# EAGLE board Clippard 8-MC_v01 (EAGLE 9.7.0)
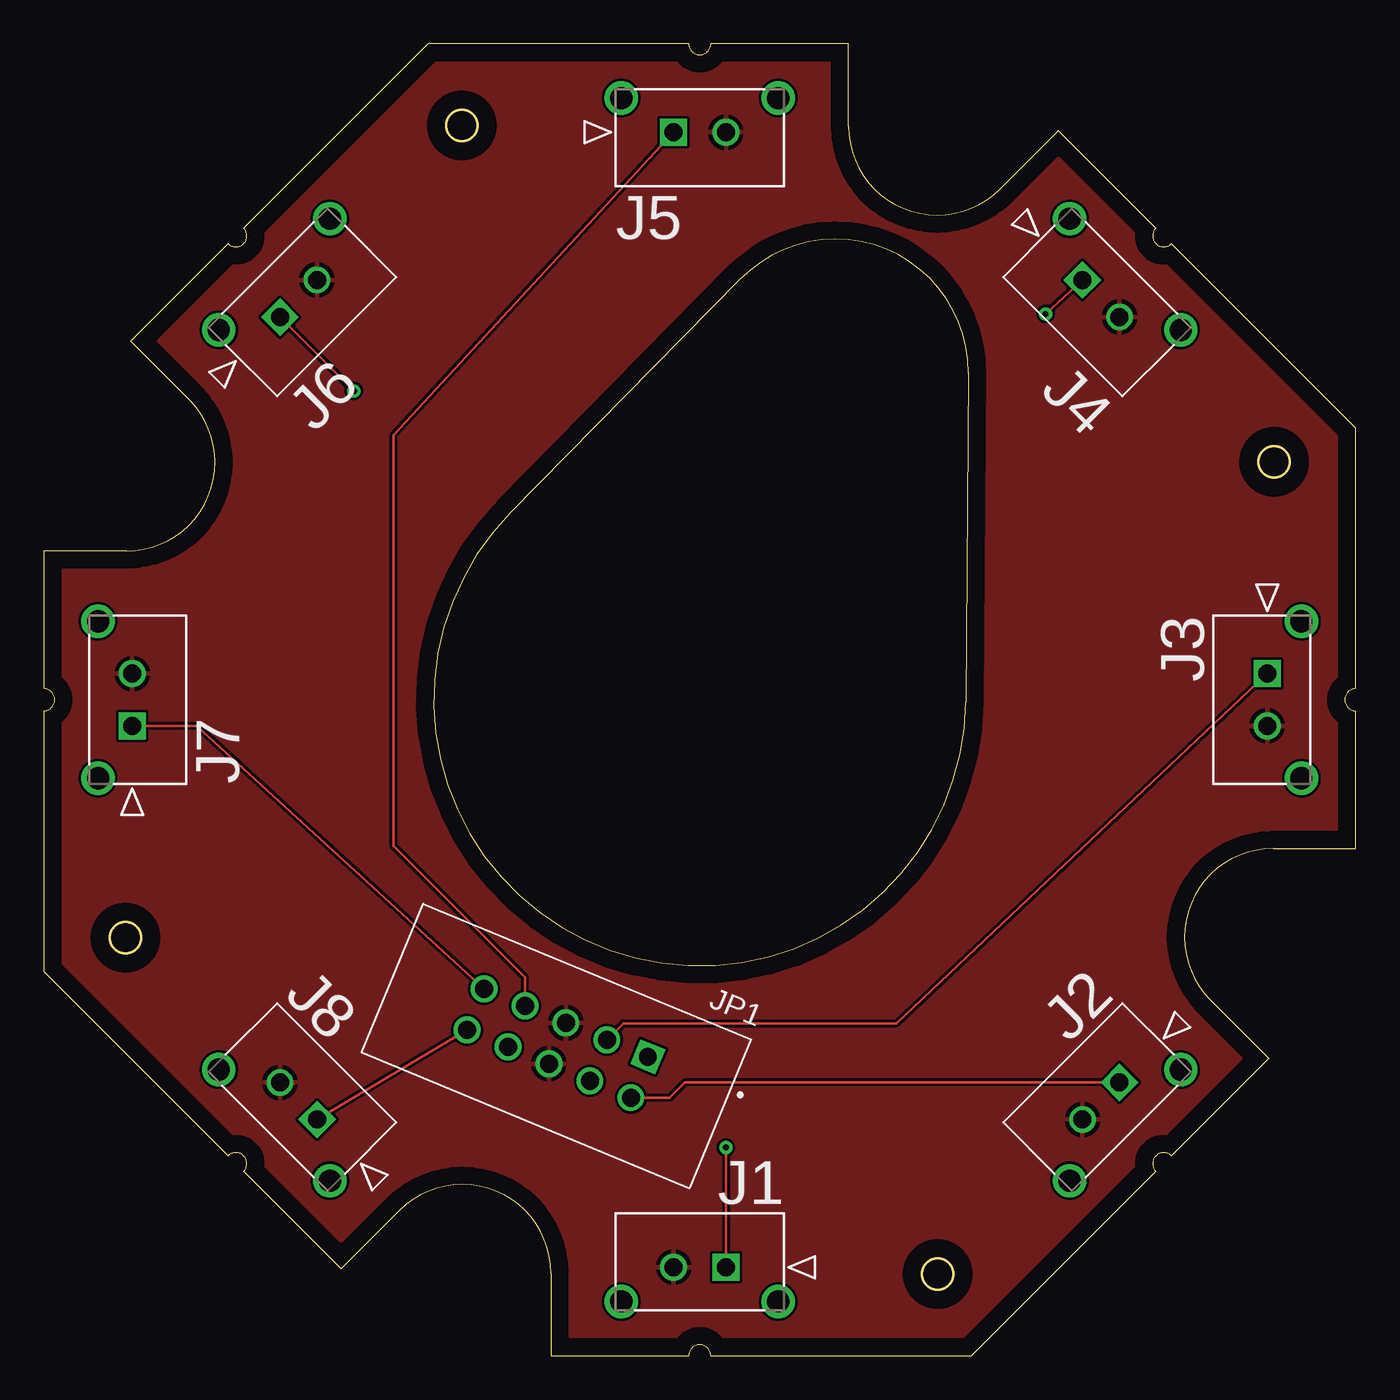
[diagram p0: board, top side]
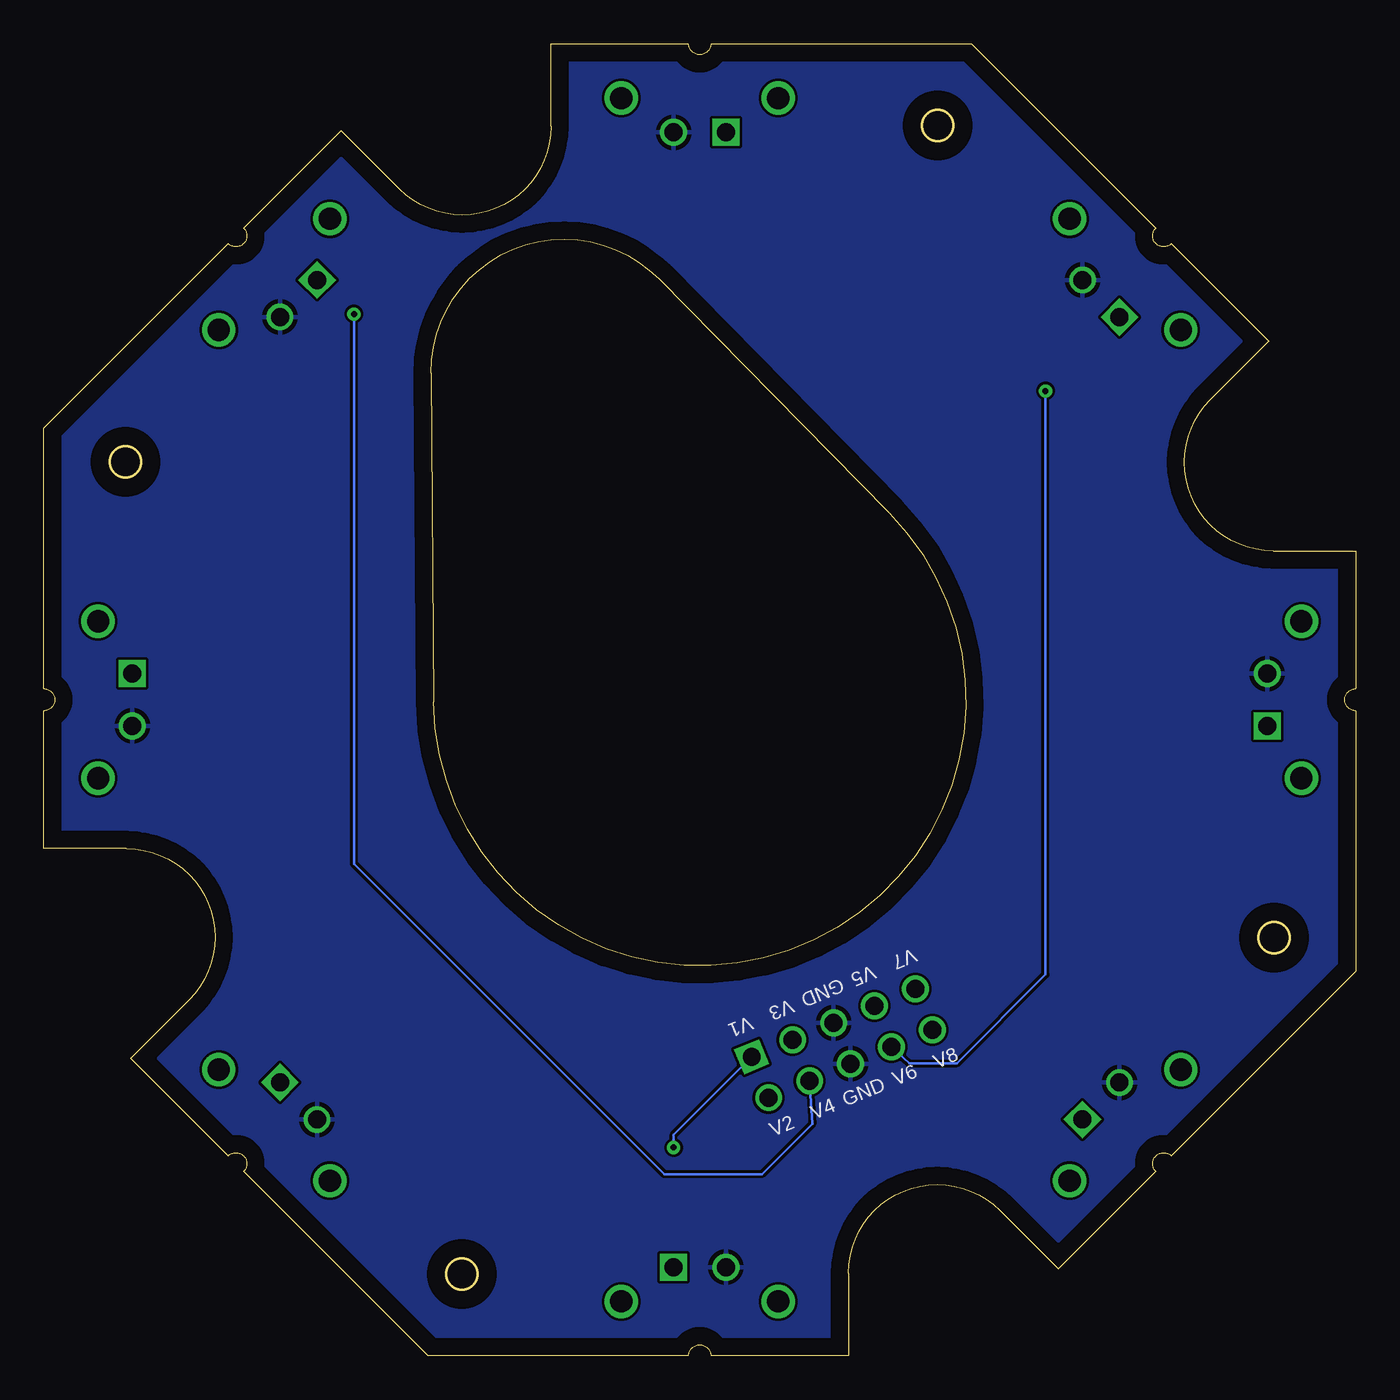
[diagram p1: board, bottom side, seen from below]

Size 75.18 x 75.18 mm. Coordinates in mm from the lower left corner, seen from the top.
Outline: 52.99,56.3 arc136 39.94,61.71 26.73,48.28 arc224 52.83,37.46 52.99,56.3
Outline: 63.72,64.62 58.14,70.2 54.79,66.85 arc-135 46.12,70.44 46.12,75.18 38.23,75.18 arc-180 36.96,75.18 22.02,75.18 11.46,64.62 arc-180 10.56,63.72 4.98,58.14 8.34,54.79 arc-135 4.74,46.12 0,46.12 0,38.23 arc-180 0,36.96 0,22.02 10.56,11.46 arc-180 11.46,10.56 17.04,4.98 20.39,8.34 arc-135 29.07,4.74 29.07,0 36.96,0 arc-180 38.23,0 53.16,0 63.72,10.56 arc-180 64.62,11.46 70.2,17.04 66.85,20.39 arc-135 70.44,29.07 75.18,29.07 75.18,36.96 arc-180 75.18,38.23 75.18,53.16 64.62,63.72 arc-180 63.72,64.62
Outline: circle at 4.69,23.96 radius 0.89
Outline: circle at 51.22,4.69 radius 0.89
Outline: circle at 23.96,70.49 radius 0.89
Outline: circle at 70.49,51.22 radius 0.89
Copper layers (1*16): Top 0.035mm / dielectric 1.5mm / Bottom 0.035mm
Design rules "default": minimum track width 6mil, minimum drill 0.35mm, track to track 6mil, track to pad 6mil, pad to pad 6mil, via to via 6mil, smd to smd 6mil, copper to edge 40mil, drill to drill 6mil, minimum pad ring 10mil, minimum via ring 8mil, stop-mask expansion 4mil, vias tented up to drill 0mil, thermal gap 10mil

## Footprints (pad centres in the part's own frame; a part is rotated, then mirrored left to right if it is on the bottom)
MOLEX_2P_FOOTPRINT_CENTERED = drill 1.02 pad 1.52 square: 1 1.5,0 | drill 1.02 pad 1.52: 2 -1.5,0 | drill 1.27 pad 1.27: M1 4.5,-1.96; M2 -4.5,-1.96
CONN_10P_TE_1761681-3_SE_FOR_V02_CENTERED = drill 1.02 pad 1.37: GND 0,-1.27; GND. 0,1.27; V2 -5.08,1.27; V3 -2.54,-1.27; V4 -2.54,1.27; V5 2.54,-1.27; V6 2.54,1.27; V7 5.08,-1.27; V8 5.08,1.27 | drill 1.02 pad 1.37 square: V1 -5.08,-1.27

## Placement (x,y rotation side)
J1  MOLEX_436500215C  [MOLEX_2P_FOOTPRINT_CENTERED]  37.59,5.08 0 top
J2  MOLEX_436500215C  [MOLEX_2P_FOOTPRINT_CENTERED]  60.58,14.6 45 top
J3  MOLEX_436500215C  [MOLEX_2P_FOOTPRINT_CENTERED]  70.1,37.59 90 top
J4  MOLEX_436500215C  [MOLEX_2P_FOOTPRINT_CENTERED]  60.58,60.58 135 top
J5  MOLEX_436500215C  [MOLEX_2P_FOOTPRINT_CENTERED]  37.59,70.1 180 top
J6  MOLEX_436500215C  [MOLEX_2P_FOOTPRINT_CENTERED]  14.6,60.58 225 top
J7  MOLEX_436500215C  [MOLEX_2P_FOOTPRINT_CENTERED]  5.08,37.59 270 top
J8  MOLEX_436500215C  [MOLEX_2P_FOOTPRINT_CENTERED]  14.6,14.6 315 top
JP1  CONN_10P_TE_1761681-3C  [CONN_10P_TE_1761681-3_SE_FOR_V02_CENTERED]  29.44,17.91 157.5 top

## Library data of the parts
J1-J8 JP1 = lib_v3

## Nets
GND1: J1.2 J2.2 J3.2 J4.2 J5.2 J6.2 J7.2 J8.2 JP1.GND JP1.GND.
V1: J1.1 JP1.V1
V2: J2.1 JP1.V2
V3: J3.1 JP1.V3
V4: J4.1 JP1.V4
V5: J5.1 JP1.V5
V6: J6.1 JP1.V6
V7: J7.1 JP1.V7
V8: J8.1 JP1.V8

## Tracks (layer width: path | path; a pad name or v marks a point on that pad's centre or on a via)
GND1
  pour Top (rank 6): 21.62,-0.69 53.31,-0.69 76.12,22.13 76.12,53.31 53.56,75.87 21.62,75.87 -0.43,53.82 -0.43,21.37
  pour Bottom (rank 6): 21.62,-0.69 53.31,-0.69 76.12,22.13 76.12,53.31 53.56,75.87 21.62,75.87 -0.43,53.82 -0.43,21.37
V1  (via drill 0.35)
  Top 0.152: v39.09,11.94 J1.1
  Bottom 0.152: v39.09,11.94 39.09,12.66 JP1.V1
V2
  Top 0.152: J2.1 36.75,15.66 35.87,14.79 JP1.V2
V3
  Top 0.152: J3.1 48.87,19.05 33.21,19.05 JP1.V3
V4  (via drill 0.35)
  Top 0.152: J4.1 v57.4,59.69
  Bottom 0.152: JP1.V4 31.14,13.3 34.04,10.41 39.62,10.41 57.4,28.19 v57.4,59.69
V5
  Top 0.152: J5.1 20.07,52.77 20.07,29.21 27.58,21.7 JP1.V5
V6  (via drill 0.35)
  Top 0.152: J6.1 v17.78,55.28
  Bottom 0.152: JP1.V6 25.59,16.76 22.86,16.76 17.78,21.84 v17.78,55.28
V7
  Top 0.152: JP1.V7 8.77,36.09 J7.1
V8
  Top 0.152: JP1.V8 J8.1

## Text on the board
bPlace: V7 | V5 | GND | V3 | V1 | V8 | V6 | GND | V4 | V2